# Altium PCB BRIDGE_RECTIFIER_01.PcbDoc
Units mm, origin at the board's own origin, x right, y up, seen from the top; angles counter-clockwise.
Board outline 77.5 x 30.5 mm, 2 copper layers (Top Layer, Bottom Layer); 11 components, 6 nets, 27 pads, 0 vias.
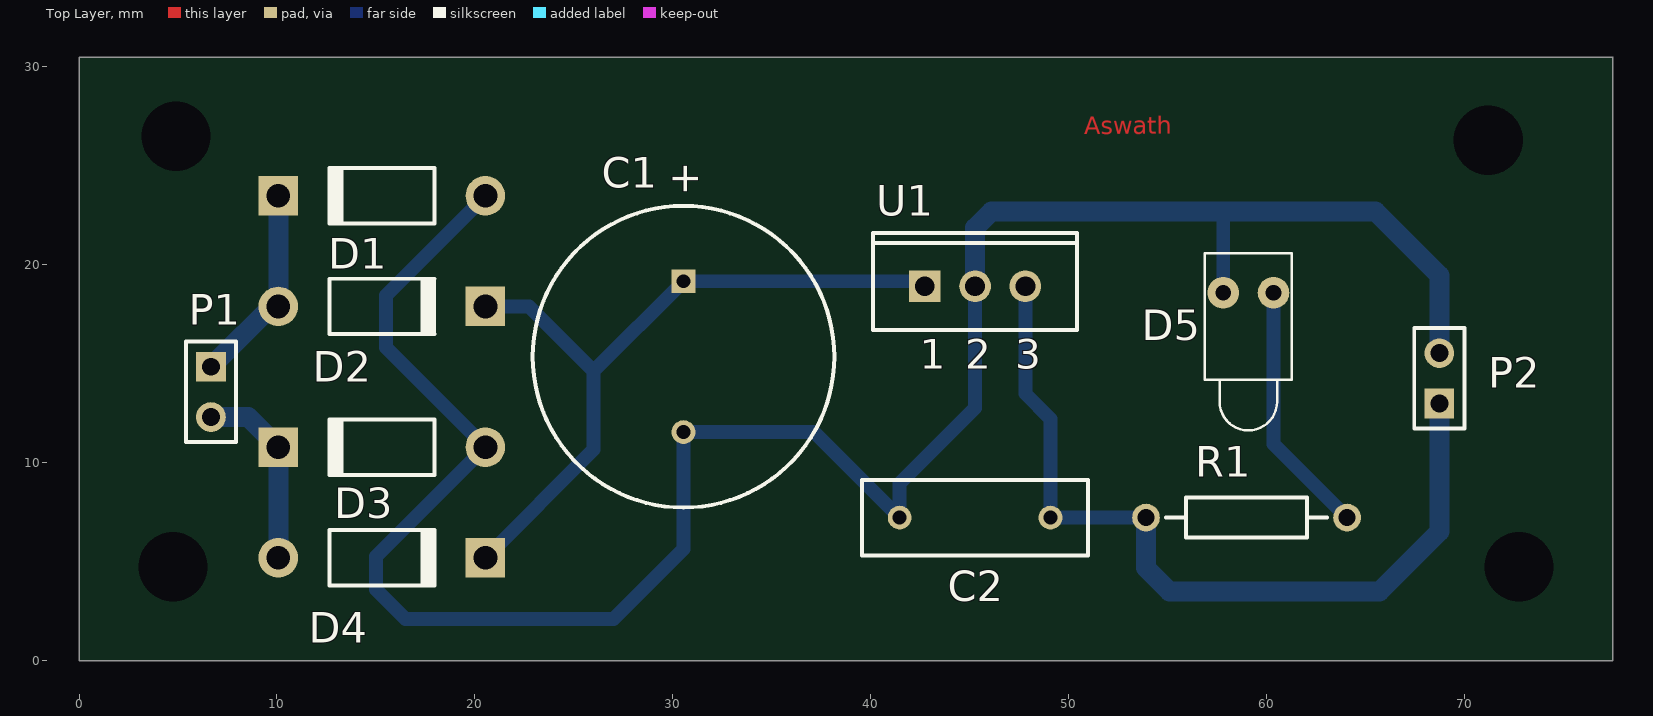
[diagram p0: Top Layer view]
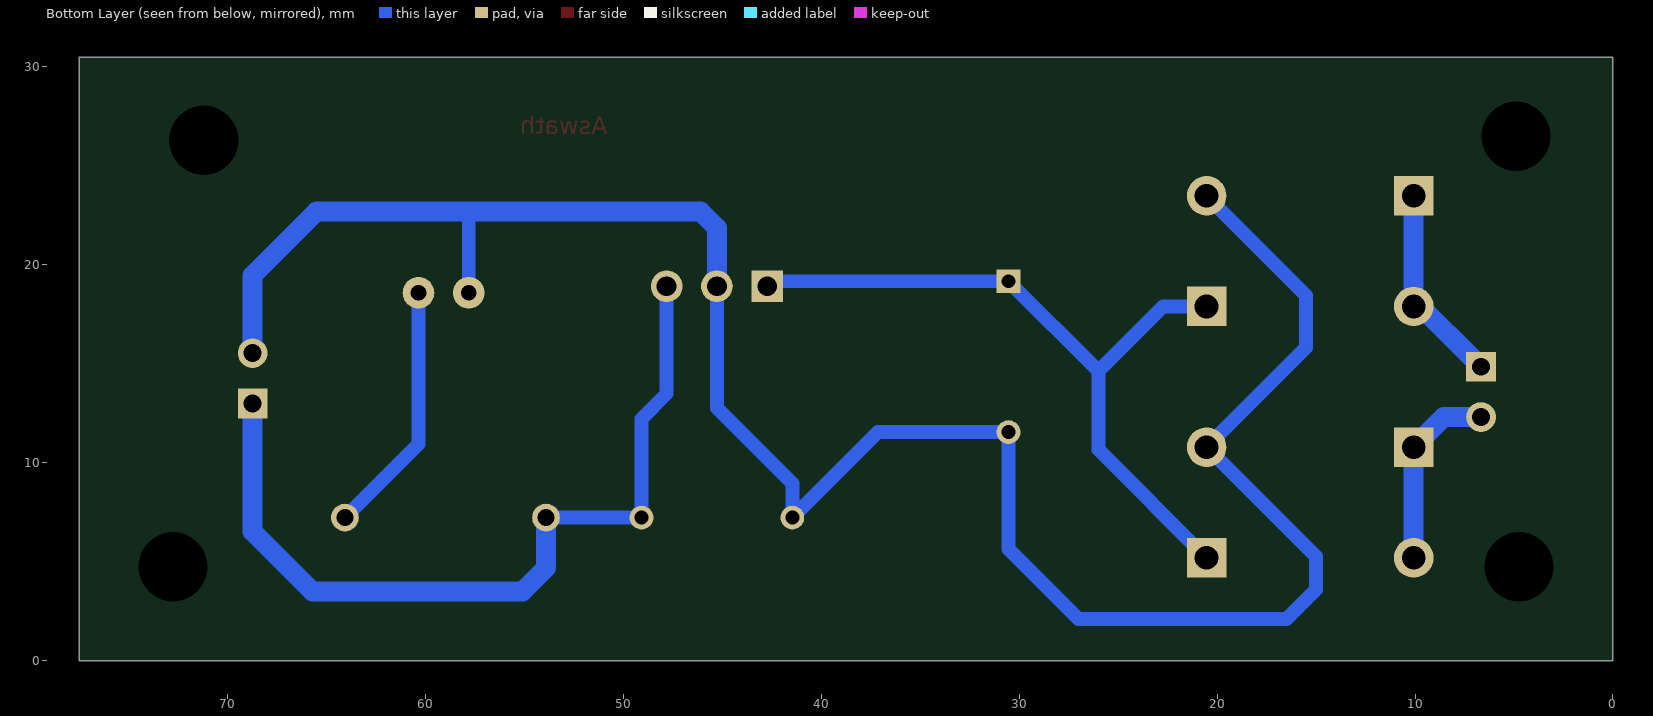
[diagram p1: Bottom Layer view, seen from below]

## Layer stack, top to bottom
Top Layer: signal copper 0.0356
Dielectric: dielectric 0.32, FR-4, Dk 4.8
Bottom Layer: signal copper 0.0356

## Board outline
0,0 0,30.5 77.5,30.5 77.5,0

## Design rules (kind name [scope] priority, off if disabled: settings)
Clearance [All] p1: gap=0.4
PolygonConnect [All] p1: connectstyle=Relief reliefconductorwidth=0.254 reliefentries=4 polygonreliefangle="90 Angle"
RoutingVias [All] p1: holewidth=0.711 width=1.27 viastyle="Through Hole" minholewidth=0.711 minwidth=1.27 maxholewidth=0.711 maxwidth=1.27
SilkscreenOverComponentPads [All] p1: minsilkscreentomaskgap=0.254
SolderMaskExpansion [All] p1: expansion=0.102
Width [All] p1: maxlimit=1.4 minlimit=0.4 preferedwidth=0.8
27 further rules are at their usual default settings.

## Components (designator, comment, footprint, x,y, rotation, side; value= is the part's Value field where it differs from the comment)
C1 "Cap Pol1" RB7.6-15 30.54,15.36 r90 top
C2 "Cap" RAD-0.3 45.272,7.232 r0 top
D1 "Diode 1N4007" DIO10.46-5.3x2.8 15.3,23.488 r180 top
D2 "Diode 1N4007" DIO10.46-5.3x2.8 15.3,17.9 r0 top
D3 "Diode 1N4007" DIO10.46-5.3x2.8 15.3,10.788 r180 top
D4 "Diode 1N4007" DIO10.46-5.3x2.8 15.3,5.2 r0 top
D5 "LED1" LED-1 59.08,18.588 r270 top
P1 "Header 2" HDR1X2 6.664,14.852 r270 top
P2 "Header 2" HDR1X2 68.732,13 r90 top
R1 "Res2" AXIAL-0.4 58.988,7.232 r180 top
U1 "MC7805ACT" 221A-04 45.272,18.916 r0 top

## Footprints (in the part's own frame and the unit in brackets; to place one, negate y for a bottom-side part, rotate by r counter-clockwise, add the part's x,y. Pads: shape width x height; smd on the part's side, far side on the other; paste and mask are expansions set on the pad)
221A-04 [mm] "TO, Thru-Hole, Vertical, Heatsink Mounted; 3 In-Line Leads; Pitch 2.54 mm"
  rect 1.6x1.6 hole 1: 1(-2.54,0)
  round 1.6 hole 1: 2(0,0) 3(2.54,0)
  silkscreen extent -5.15,-2.2 5.15,2.7
AXIAL-0.4 [mm] "Axial Device, Thru-Hole; 2 Leads; 0.4 in Pin Spacing"
  round 1.4 hole 0.85: 1(-5.08,0) 2(5.08,0)
  silkscreen extent -4.06,-1.02 4.06,1.02
DIO10.46-5.3x2.8 [mm] "Diode, Axial; Body 5.2 x 2.7 mm (LxDia. max), Lead Dia. 0.86 mm (max)"
  round 2 hole 1.2: 1(-5.23,0)
  rect 2x2 hole 1.2: 2(5.23,0)
  silkscreen extent -2.65,-1.41 2.75,1.4
HDR1X2 [mm] "Connector; Header; 2 Position"
  rect 1.5x1.5 hole 0.9: 1(0,0)
  round 1.5 hole 0.9: 2(2.54,0)
  silkscreen extent -1.27,-1.27 3.81,1.27
LED-1 [mm] "Typical RED GaAs LED; 2 Leads"
  round 1.6 hole 0.8: 1(0,1.27) 2(0,-1.27)
  silkscreen extent -2,-2.2 6.95,2.2
RAD-0.3 [mm] "Radial Cap, Thru-Hole; 2 Leads; 0.3 in Pin Spacing"
  round 1.2 hole 0.7: 1(-3.81,0) 2(3.81,0)
  silkscreen extent -5.71,-1.91 5.71,1.91
RB7.6-15 [mm] "Polarized Capacitor (Radial); 2 Leads"
  rect 1.2x1.2 hole 0.7: 1(3.81,0)
  round 1.2 hole 0.7: 2(-3.81,0)
  silkscreen extent -7.62,-7.62 7.62,7.62

## Part data
C1: "Polarized Capacitor (Radial)"
C2: "Capacitor"
D1 D2 D3 D4: "1 Amp General Purpose Rectifier"
D5: "Typical RED GaAs LED"
P1 P2: "Header, 2-Pin"
R1: "Resistor"
U1: "3-Terminal Positive Fixed Voltage Regulator"

## Free pads (board coordinates)
  round 1.524 hole 3.5: 0(4.75,4.75) 0(4.9,26.5) 0(71.2,26.3) 0(72.75,4.75)

## Nets (pads, with @x,y where several pads share a name; then routed paths per layer and width w, separated by ;. In a path a pad name is that pad's centre, name@x,y a point inside that pad or via, vN(x,y) a via of type N, cw(c..) or ccw(c..) an arc to the next point about the centre after c; other vN are vias at no path point)
+5V: C2.2 P2.1 R1.2 U1.3 | length 42.6
  Bottom Layer w0.7: U1.3 47.812,13.488 49.082,12.218 C2.2 R1.2
  Bottom Layer w1: R1.2 53.908,4.692 55.1,3.5 65.7,3.5 68.732,6.532 P2.1
GND: C1.2 C2.1 D1.1 D3.1 D5.2 P2.2 U1.2 | length 112.4
  Bottom Layer w0.7: D1.1 15.5,18.458 15.5,15.818 D3.1 15,5.258 15,3.6 16.5,2.1 27,2.1 30.54,5.64 C1.2 37.144,11.55 C2.1 41.462,8.962 45.272,12.772 U1.2 ; D5.2@57.5,18.898 D5.2 57.81,22.69 57.8,22.7
  Bottom Layer w1: U1.2 45.272,21.872 46.1,22.7 57.8,22.7 65.5,22.7 68.732,19.468 P2.2
NetC1_1: C1.1 D2.2 D4.2 U1.1 | length 37.2
  Bottom Layer w0.7: D4.2 26,10.67 26,14.63 ; D2.2 22.73,17.9 26,14.63 ; U1.1 42.478,19.17 C1.1 26,14.63
NetD1_2: D1.2 D2.1 P1.1 | length 10
  Bottom Layer w1: P1.1 10.07,18.258 D1.2
NetD3_2: D3.2 D4.1 P1.2 | length 9.6
  Bottom Layer w1: P1.2 8.546,12.312 D3.2 D4.1
NetD5_1: D5.1 R1.1 | length 13
  Bottom Layer w0.4: R1.1 R1.1@64.068,7.332
  Bottom Layer w0.7: D5.1 60.35,10.95 R1.1

## Other copper
Top Layer:
  text "Aswath" at 50.8,26.3 h1.52 r0.3

## Silkscreen, mask and mechanical layers (free items; w line width, h text height)
Mechanical 1:
  lines w0.254: 77.5,30.5 77.5,30.5 ; 77.5,30.5 77.5,30.5 ; 77.5,30.5 77.5,0 0,0 0,30.5 77.5,30.5

## Text inside footprints (layer, text, board x,y; h text height)
C1: Top Overlay "+" at 31.277,23.492 h1.5 r90
U1: Top Overlay "1" at 42.482,14.741 h1.5; Top Overlay "2" at 44.772,14.741 h1.5; Top Overlay "3" at 47.312,14.741 h1.5